# Altium PCB PCB_UNLOCK.PcbDoc
Units mm, origin at the board's own origin, x right, y up, seen from the top; angles counter-clockwise.
Board outline 139.45 x 104.01 mm, 2 copper layers (Top Layer, Bottom Layer); 23 components, 16 nets, 100 pads, 11 vias.
Unrouted connection lines stored in the file: 1.
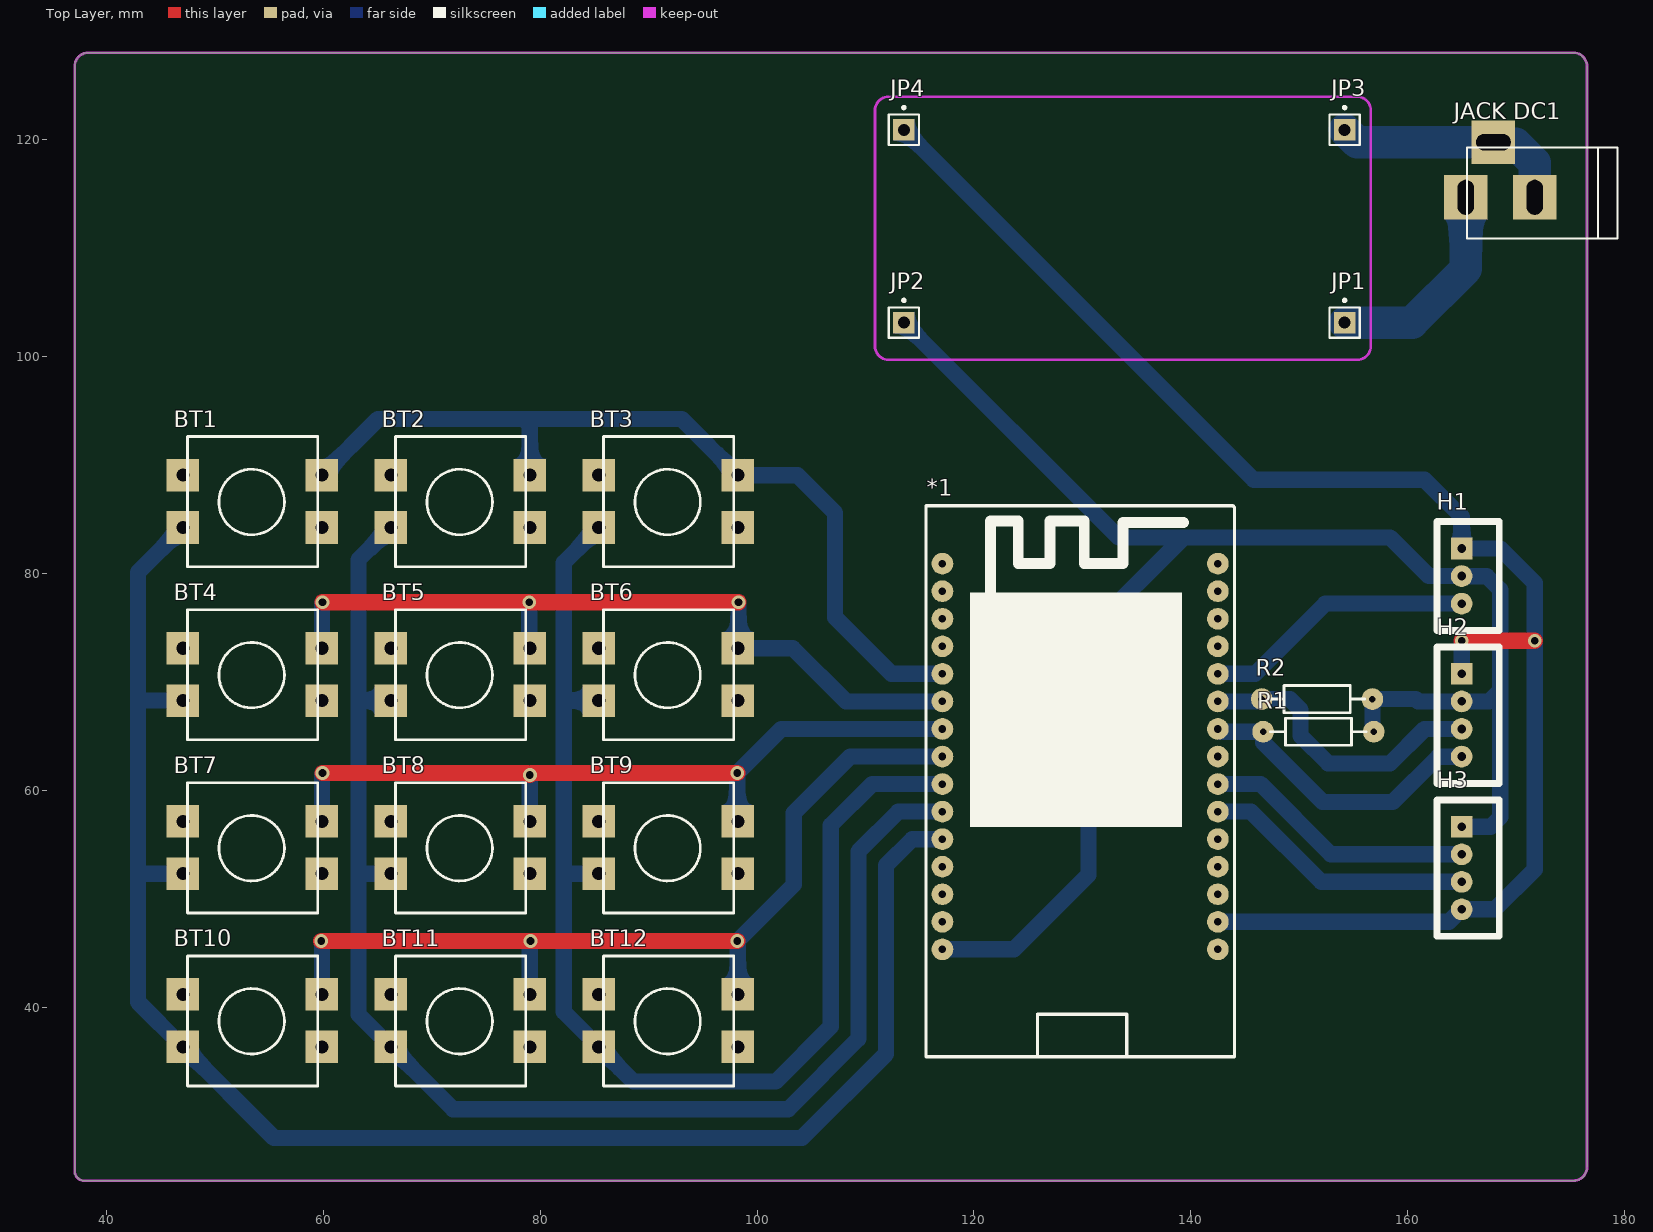
[diagram p0: Top Layer view]
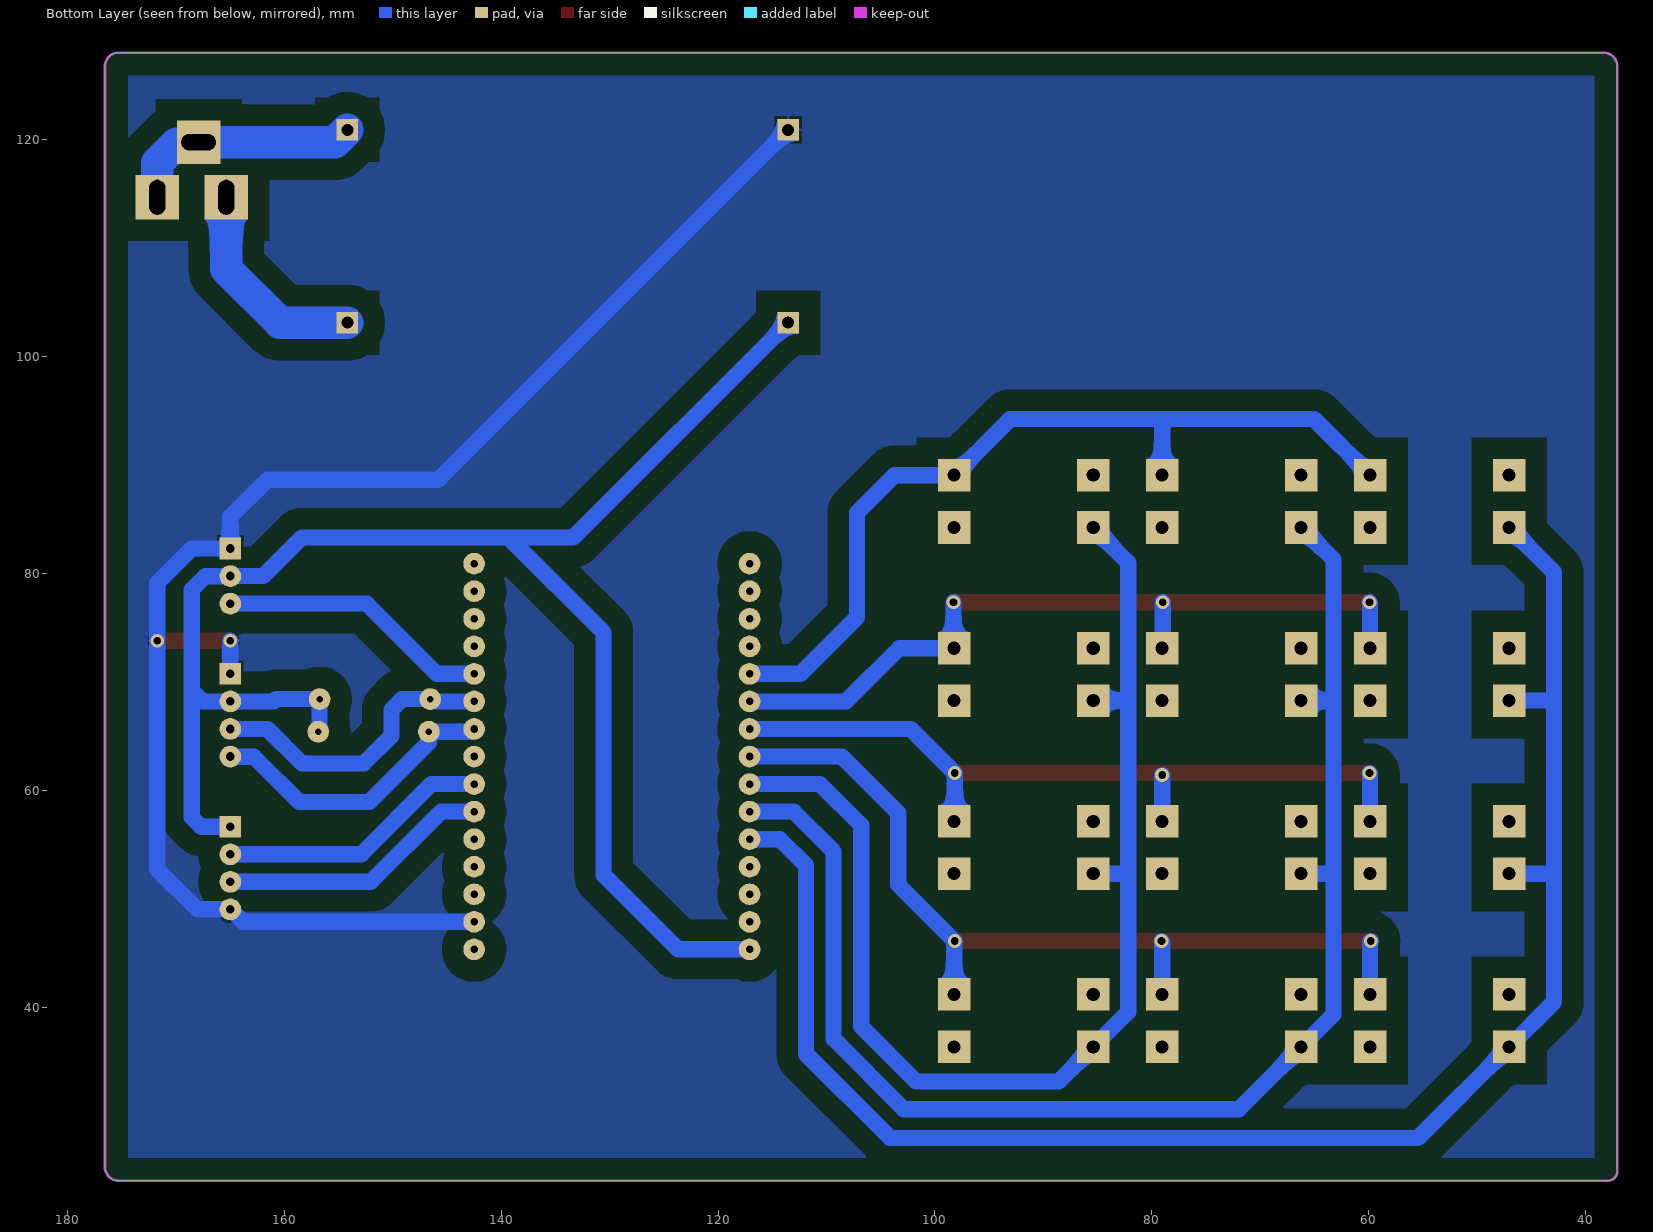
[diagram p1: Bottom Layer view, seen from below]
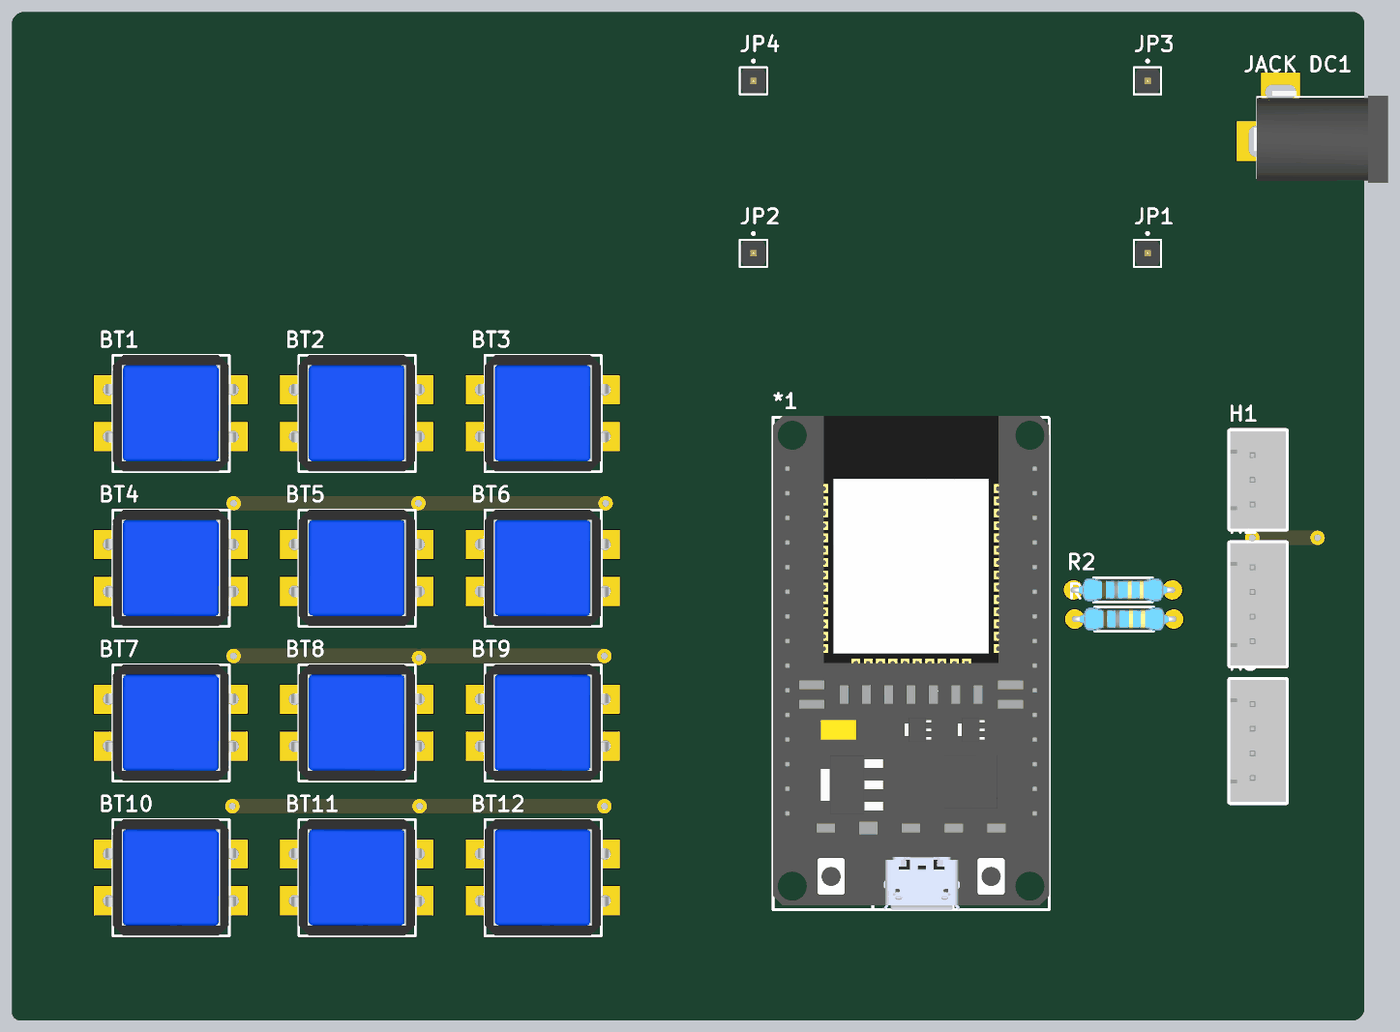
[diagram p2: 3D render of the assembled board from above, using the file's embedded part models]

## Layer stack, top to bottom
Top Solder: solder mask 0.0102, Solder Resist, Dk 3.5
Top Layer: signal copper 0.0356
Dielectric 1: dielectric 0.32, FR-4, Dk 4.8
Bottom Layer: signal copper 0.0356
Bottom Solder: solder mask 0.0102, Solder Resist, Dk 3.5

## Board outline
37.084,24.892 ccw(c37.973,24.892) 37.973,24.003 175.26,24.003 ccw(c175.26,25.273) 176.53,25.273 176.53,126.746 ccw(c175.26,126.746) 175.26,128.016 38.354,128.016 ccw(c38.354,126.746) 37.084,126.746

## Design rules (kind name [scope] priority, off if disabled: settings)
Clearance [All] p1: gap=2 ignorepadtopadclearanceinfootprint=FALSE
PolygonConnect [All] p1: connectstyle=Relief reliefconductorwidth=0.254 reliefentries=4 polygonreliefangle="90 Angle" airgapwidth=0.254
RoomDefinition SCH_UNLOCK [InComponentClass('SCH_UNLOCK')] p1: confinementstyle=ConfineIn formatcopy=TRUE lockcomponents=FALSE outline 0,0 50.8,0 50.8,25.4 0,25.4
RoutingVias [All] p1: holewidth=0.711 width=1.27 viastyle="Through Hole" minholewidth=0.711 minwidth=1.27 maxholewidth=0.711 maxwidth=1.27
SolderMaskExpansion [All] p1: expansion=0.102 istentingtop=FALSE
Width [All] p1: maxlimit=3 minlimit=1 preferedwidth=1.5
30 further rules are at their usual default settings.

## Components (designator, comment, footprint, x,y, rotation, side; value= is the part's Value field where it differs from the comment)
*1 "ESP32_30PIN" ESP32_30PIN 142.494,80.899 r180 top
BT1 "Nut Nhan 4 chan 12x12" "12X12 BUTTOM Blue" 53.467,86.614 r180 top
BT2 "Nut Nhan 4 chan 12x12" "12X12 BUTTOM Blue" 72.644,86.614 r180 top
BT3 "Nut Nhan 4 chan 12x12" "12X12 BUTTOM Blue" 91.821,86.614 r180 top
BT4 "Nut Nhan 4 chan 12x12" "12X12 BUTTOM Blue" 53.467,70.654 r180 top
BT5 "Nut Nhan 4 chan 12x12" "12X12 BUTTOM Blue" 72.644,70.654 r180 top
BT6 "Nut Nhan 4 chan 12x12" "12X12 BUTTOM Blue" 91.821,70.654 r180 top
BT7 "Nut Nhan 4 chan 12x12" "12X12 BUTTOM Blue" 53.467,54.695 r180 top
BT8 "Nut Nhan 4 chan 12x12" "12X12 BUTTOM Blue" 72.644,54.695 r180 top
BT9 "Nut Nhan 4 chan 12x12" "12X12 BUTTOM Blue" 91.821,54.695 r180 top
BT10 "Nut Nhan 4 chan 12x12" "12X12 BUTTOM Blue" 53.467,38.735 r180 top
BT11 "Nut Nhan 4 chan 12x12" "12X12 BUTTOM Blue" 72.644,38.735 r180 top
BT12 "Nut Nhan 4 chan 12x12" "12X12 BUTTOM Blue" 91.821,38.735 r180 top
H1 "SERVO" XH2.54M-3 164.973,82.296 r270 top
H2 "LCD" XH2.54M-4 164.973,70.739 r270 top
H3 "AS608" XH2.54M-4 164.973,56.642 r270 top
"JACK DC1" "JACK DC 5.5" "JACK DC 5.5" 168.529,117.221 r180 top value="Jac DC"
JP1 "JP 1x1 2.54" "JP 1x1 DT" 154.178,103.124 r0 top
JP2 "JP 1x1 2.54" "JP 1x1 DT" 113.538,103.124 r0 top
JP3 "JP 1x1 2.54" "JP 1x1 DT" 154.178,120.904 r0 top
JP4 "JP 1x1 2.54" "JP 1x1 DT" 113.538,120.904 r0 top
R1 "10k" "tro vach 1/4w" 151.765,65.405 r180 top
R2 "10k" "tro vach 1/4w" 151.638,68.413 r180 top

## Footprints (in the part's own frame and the unit in brackets; to place one, negate y for a bottom-side part, rotate by r counter-clockwise, add the part's x,y. Pads: shape width x height; smd on the part's side, far side on the other; paste and mask are expansions set on the pad)
"12X12 BUTTOM Blue" [mm]
  rect 3x3 hole 1.2: 1(-6.413,2.38) 2(-6.413,-2.446) 3(6.413,2.38) 4(6.413,-2.446)
  silkscreen extent -6.03,-6 5.97,6, body extent -6.71,-6.03 6.71,5.98, height 8.84
ESP32_30PIN [mm]
  round 2 hole 0.7: 3.3(0,35.56) D2(0,27.94) D4(0,25.4) D5(0,17.78) D12(25.4,27.94) D13(25.4,30.48) D14(25.4,25.4) D15(0,30.48) D18(0,15.24) D19(0,12.7) D21(0,10.16) D22(0,2.54) D23(0,0) D25(25.4,17.78) D26(25.4,20.32) D27(25.4,22.86) D32(25.4,12.7) D33(25.4,15.24) D34(25.4,7.62) D35(25.4,10.16) EN(25.4,0) GND(0,33.02) GND(25.4,33.02) RX0(0,7.62) RX2(0,22.86) TX0(0,5.08) TX2(0,20.32) VIN(25.4,35.56) VN(25.4,5.08) VP(25.4,2.54)
  silkscreen extent -1.52,-5.33 26.92,45.47, body extent -1.55,-5.46 26.95,45.47, height 7.2
"JACK DC 5.5" [mm] "Jac DC input"
  rect 4x4.064 hole 1.5 slot 3.2 at 90 deg: 1(3.175,2.54) 2(-3.175,2.54)
  rect 4x4 hole 1.5 slot 3.2 at 0 deg: 3(0.635,-2.54)
  silkscreen extent -10.8,-2.03 3.05,6.35, body extent -10.42,-2.67 3.4,6.84, height 11.02
"JP 1x1 DT" [mm] "1pins, 1 row, straight, gold plating"
  rect 2x2 hole 1.1: 1(0,0)
  silkscreen extent -1.4,-1.4 1.4,2.17, body extent -1.27,-1.27 1.27,1.27, height 8.54
"tro vach 1/4w" [mm]
  round 2 hole 0.6: 1(-5.1,0) 2(5.1,0)
  silkscreen extent -4.39,-1.25 4.42,1.25, body extent -5.38,-1.2 5.38,1.2, height 2.41
XH2.54M-3 [mm]
  rect 2x2 hole 0.8: 1(0,0)
  round 2 hole 0.8: 2(2.54,0) 3(5.08,0)
  silkscreen extent -2.48,-2.26 7.56,3.46, body extent -2.48,-2.26 7.56,3.48, height 6.91
XH2.54M-4 [mm]
  rect 2x2 hole 0.8: 1(0,0)
  round 2 hole 0.8: 2(2.54,0) 3(5.08,0) 4(7.62,0)
  silkscreen extent -2.48,-2.26 10.1,3.46, body extent -2.48,-2.26 10.1,3.48, height 6.91

## Part data
H1: library part "Header 3P 2.54 Duc Thang", "Cắm", Chung_Loai=Cắm, Don_Vi=Con, Ma_Hang=MH001292, Ten_Linh_Kien="Header 3P XH2.54-3P Đực Thẳng"
H2 H3: library part "Header 4P 2.54 Duc Thang", "Cắm", Chung_Loai=Cắm, Don_Vi=Con, Ma_Hang=MH001285, Ten_Linh_Kien="Header 4P XH2.54-4P Đực Thẳng"
JP1 JP2 JP3 JP4: library part "JP 1x1 2.54 Duc Cong", "Cắm", Chung_Loai=Cắm, Don_Vi=Con, Ma_Hang=MH000904, Ten_Linh_Kien="Jump Đơn Đực 2.54MM 1x40P Cong Đứng"
R1 R2: library part "Tro Vach 1/4W 5% 10k", "Căm", Chung_Loai=Cắm, Don_Vi=Con, Ma_Hang=MH007354, So_Chan=2, Ten_Linh_Kien="Trở Vạch 1/4w 5% 10K"

## Via types
v1: diameter 1.27, hole 0.711, Top Layer to Bottom Layer, 11 vias

## Nets (pads, with @x,y where several pads share a name; then routed paths per layer and width w, separated by ;. In a path a pad name is that pad's centre, name@x,y a point inside that pad or via, vN(x,y) a via of type N, cw(c..) or ccw(c..) an arc to the next point about the centre after c; other vN are vias at no path point)
+12: "JACK DC1.1" JP1.1 | length 19.8
  Bottom Layer w3: JP1.1 160.401,103.124 165.354,108.077 165.354,114.681
COL1: *1.D14 BT1.3 BT4.3 BT7.3 BT10.3 | length 154.8
  Bottom Layer w1.5: BT7.3 43.063,52.314 42.926,52.451 ; BT4.3 43.128,68.274 42.926,68.072 ; BT1.3 42.926,80.106 42.926,68.072 ; *1.D14 114.3,55.499 111.887,53.086 111.887,35.687 104.14,27.94 55.468,27.94 BT10.3 42.926,40.482 42.926,52.451 ; 42.926,52.451 42.926,68.072
COL2: *1.D27 BT2.3 BT5.3 BT8.3 BT11.3 | length 131.1
  Bottom Layer w1.5: BT8.3 63.256,52.314 63.246,52.324 ; BT5.3 63.425,68.274 63.246,68.453 ; BT2.3 63.246,81.249 63.246,68.453 ; *1.D27 113.03,58.039 109.347,54.356 109.347,37.084 102.87,30.607 71.978,30.607 BT11.3 63.246,39.339 63.246,52.324 ; 63.246,52.324 63.246,68.453
COL3: *1.D26 BT3.3 BT6.3 BT9.3 BT12.3 | length 112.5
  Bottom Layer w1.5: BT9.3 82.306,52.314 82.169,52.451 ; BT6.3 82.602,68.274 82.169,68.707 ; BT3.3 82.169,80.995 82.169,68.707 ; *1.D26 110.617,60.579 106.807,56.769 106.807,38.227 101.727,33.147 88.615,33.147 BT12.3 82.169,39.593 82.169,52.451 ; 82.169,52.451 82.169,68.707
GND: *1.GND H1.1 H2.1 H3.4 JP4.1 | length 144.6
  Top Layer w1.5: v1(164.973,73.787) v1(171.704,73.787)
  Bottom Layer w1.5: JP4.1 145.796,88.646 161.544,88.646 164.973,85.217 H1.1 168.529,82.296 171.704,79.121 v1(171.704,73.787) 171.704,52.705 168.023,49.024 164.975,49.024 H3.4 164.946,49.022 163.803,47.879 *1.GND@142.494,47.879 ; H2.1 v1(164.973,73.787)
IGND: "JACK DC1.2" "JACK DC1.3" JP3.1 | length 22
  Bottom Layer w3: JP3.1 155.321,119.761 167.894,119.761 168.042,119.613 169.947,119.613 171.704,117.856 171.704,114.681
ROW1: *1.D35 BT1.2 BT2.2 BT3.2 | length 80.2
  Bottom Layer w1.5: BT1.2 65.055,94.234 78.486,94.234 ; BT2.2 79.057,93.662 78.486,94.234 ; *1.D35 112.395,70.739 107.188,75.946 107.188,85.598 103.727,89.06 BT3.2 93.06,94.234 78.486,94.234
ROW2: *1.D32 BT4.2 BT5.2 BT6.2 | length 72.3
  Top Layer w1.5: v1(59.944,77.343) v1(78.994,77.343) v1(98.298,77.343)
  Bottom Layer w1.5: BT4.2 59.88,77.279 v1(59.944,77.343) ; v1(78.994,77.343) 78.994,73.163 BT5.2 ; v1(98.298,77.343) 98.298,73.163 BT6.2 ; BT6.2@98.436,72.898 BT6.2 ; *1.D32 108.204,68.199 103.303,73.1 BT6.2
ROW3: *1.D33 BT7.2 BT8.2 BT9.2 | length 72.2
  Top Layer w1.5: v1(59.944,61.595) 78.867,61.595 v1(79.057,61.404) 79.248,61.595 v1(98.171,61.595)
  Bottom Layer w1.5: BT7.2 59.88,61.531 v1(59.944,61.595) ; BT8.2 v1(79.057,61.404) ; BT9.2 98.171,57.204 v1(98.171,61.595) 102.235,65.659 *1.D33
ROW4: *1.D25 BT10.2 BT11.2 BT12.2 | length 83
  Top Layer w1.5: v1(59.817,46.101) v1(79.121,46.101) v1(98.171,46.101)
  Bottom Layer w1.5: v1(59.817,46.101) 59.88,46.038 BT10.2 ; BT11.2 79.057,46.038 v1(79.121,46.101) ; BT12.2 98.234,46.038 v1(98.171,46.101) 103.378,51.308 103.378,57.912 108.585,63.119 *1.D25
RX: *1.RX2 H3.3 | length 25.2
  Bottom Layer w1.5: *1.RX2 145.542,58.039 152.019,51.562 H3.3
S: *1.D21 H1.3 | length 25.2
  Bottom Layer w1.5: *1.D21 145.923,70.739 152.4,77.216 H1.3
SCL: *1.D18 H2.4 R1.2 | length 27.6
  Bottom Layer w1.5: *1.D18 142.748,65.405 R1.2 146.665,64.409 152.146,58.928 158.623,58.928 162.795,63.1 164.954,63.1 H2.4
SDA: *1.D19 H2.3 R2.2 | length 27.8
  Bottom Layer w1.5: *1.D19 146.324,68.199 R2.2 149.138,68.413 150.114,67.437 150.114,65.024 152.654,62.484 158.369,62.484 161.544,65.659 H2.3
TX: *1.TX2 H3.2 | length 25.2
  Bottom Layer w1.5: *1.TX2 146.431,60.579 152.908,54.102 H3.2
VCC: *1.VIN H1.2 H2.2 H3.1 JP2.1 R1.1 R2.1 | length 156.5
  Bottom Layer w1.5: JP2.1 133.35,83.312 139.319,83.312 ; *1.VIN 123.698,45.339 130.556,52.197 130.556,74.549 139.319,83.312 ; R1.1 156.738,65.532 R2.1 160.735,68.413 160.949,68.199 H2.2 167.513,68.199 168.529,69.215 ; H3.1 167.64,56.642 168.529,57.531 168.529,69.215 ; 139.319,83.312 158.369,83.312 161.923,79.758 164.971,79.758 H1.2 164.992,79.737 167.278,79.737 168.529,78.486 168.529,69.215
pads on no net: *1.3.3 *1.D2 *1.D4 *1.D5 *1.D12 *1.D13 *1.D15 *1.D22 *1.D23 *1.D34 *1.EN *1.RX0 *1.TX0 *1.VN *1.VP BT1.1 BT1.4 BT2.1 BT2.4 BT3.1 BT3.4 BT4.1 BT4.4 BT5.1 BT5.4 BT6.1 BT6.4 BT7.1 BT7.4 BT8.1 BT8.4 BT9.1 BT9.4 BT10.1 BT10.4 BT11.1 BT11.4 BT12.1 BT12.4

## Polygon pours and split planes (outlines as drawn)
GND on Bottom Layer "GND" (solid, remove dead copper, pour order 0): 36.068,129.286 36.068,24.892 ccw(c38.608,24.892) 38.608,22.352 178.435,22.352 ccw(c178.435,22.606) 178.689,22.606 178.689,128.651

## Keep-outs
Top Layer:
  lines w0.254: 112.141,123.952 ccw(c112.141,122.682) 110.871,122.682 110.871,100.965 ccw(c112.141,100.965) 112.141,99.695 155.321,99.695 ccw(c155.321,100.965) 156.591,100.965 156.591,122.682 ccw(c155.321,122.682) 155.321,123.952 112.395,123.952
Keep-Out Layer:
  lines w0.254: 37.084,24.892 ccw(c37.973,24.892) 37.973,24.003 175.26,24.003 ccw(c175.26,25.273) 176.53,25.273 176.53,121.92 176.53,126.746 ccw(c175.26,126.746) 175.26,128.016 38.354,128.016 ccw(c38.354,126.746) 37.084,126.746 37.084,24.892